# EAGLE board power (EAGLE 7.5.0)
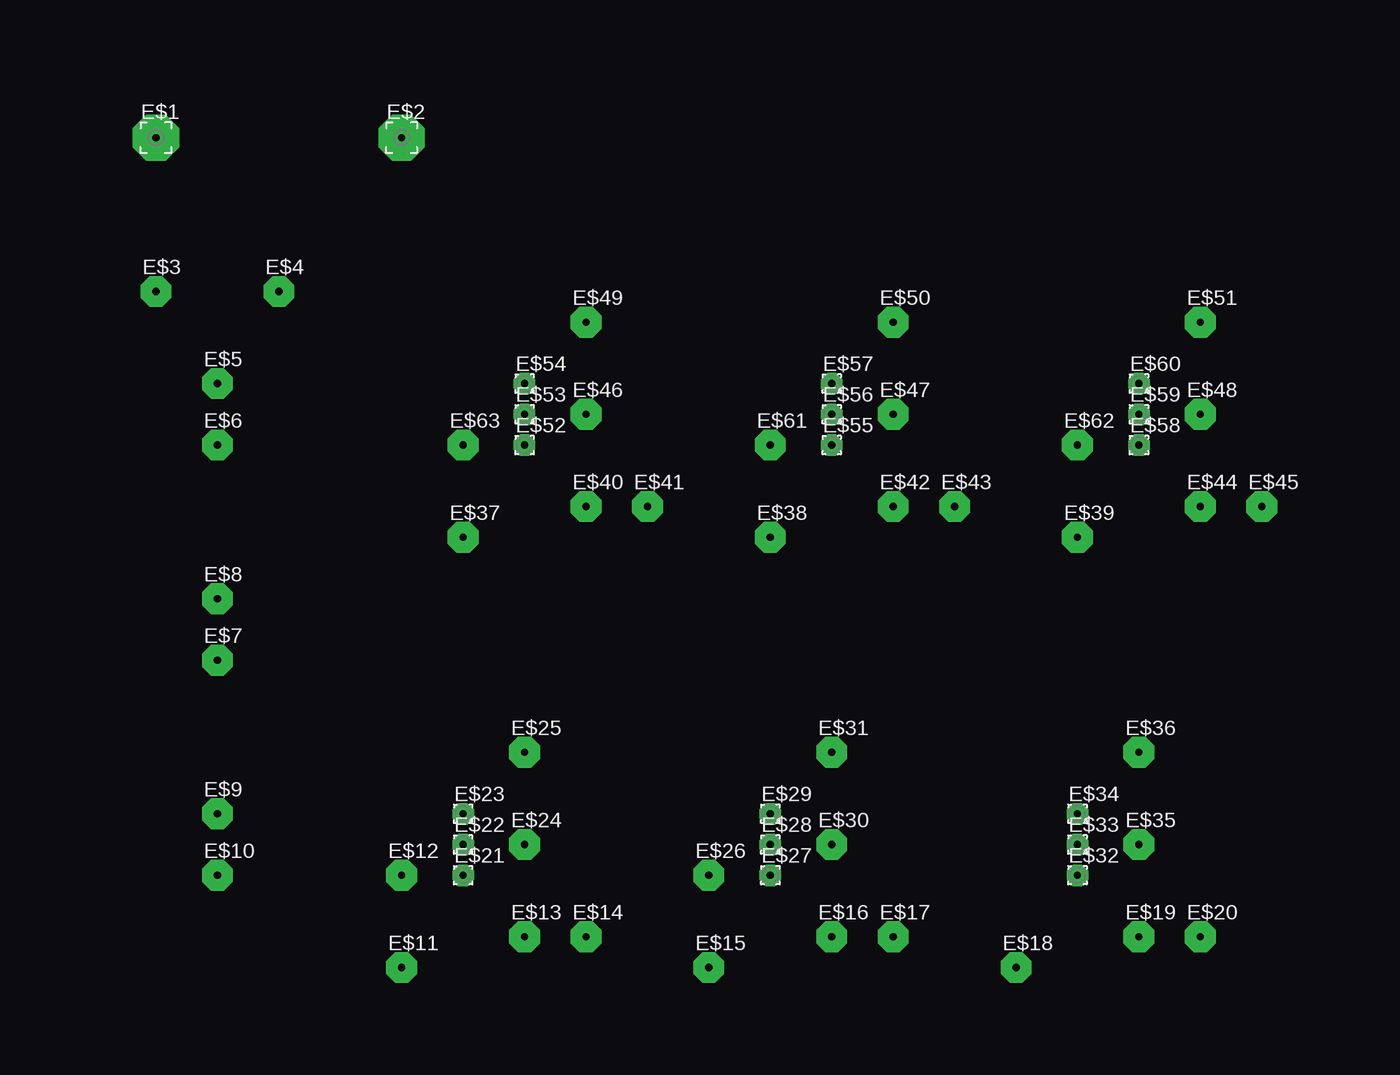
[diagram p0: board, top side]
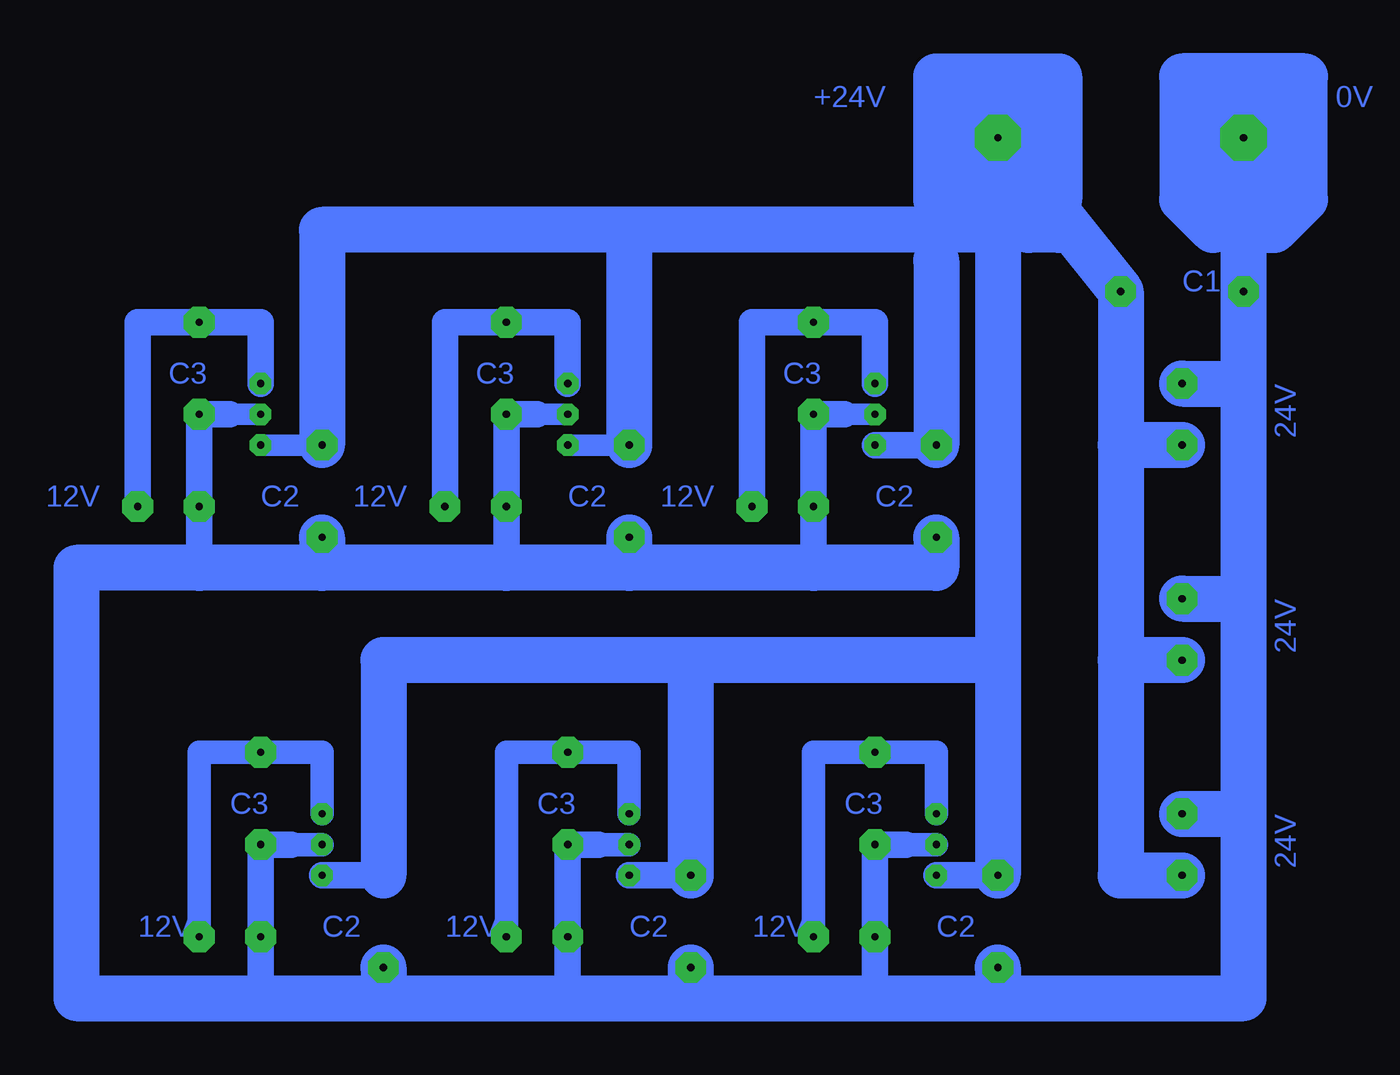
[diagram p1: board, bottom side, seen from below]

No outline drawn. Coordinates in mm, seen from the top.
Copper layers (1*16): Top 0.035mm / dielectric 1.5mm / Bottom 0.035mm
Design rules "default": minimum track width 10mil, minimum drill 24mil, track to track 8mil, track to pad 8mil, pad to pad 8mil, via to via 8mil, smd to smd 8mil, copper to edge 40mil, drill to drill 8mil, minimum pad ring 10mil, minimum via ring 8mil, stop-mask expansion 4mil, vias tented up to drill 0mil, thermal gap 10mil

## Footprints (pad centres in the part's own frame; a part is rotated, then mirrored left to right if it is on the bottom)
2,54/0,8 = drill 0.6 pad 3.81 octagon: 1 0,0
2,15/1,0 = drill 0.6 pad 2.54 octagon: 1 0,0
1,6/0,8 = drill 0.6 pad 1.778 octagon: 1 0,0

## Placement (x,y rotation side)
E$1  [2,54/0,8]  2.54,78.74 0 top
E$2  [2,54/0,8]  22.86,78.74 0 top
E$3  [2,15/1,0]  2.54,66.04 0 top
E$4  [2,15/1,0]  12.7,66.04 0 top
E$5  [2,15/1,0]  7.62,58.42 0 top
E$6  [2,15/1,0]  7.62,53.34 0 top
E$7  [2,15/1,0]  7.62,35.56 0 top
E$8  [2,15/1,0]  7.62,40.64 0 top
E$9  [2,15/1,0]  7.62,22.86 0 top
E$10  [2,15/1,0]  7.62,17.78 0 top
E$11  [2,15/1,0]  22.86,10.16 0 top
E$12  [2,15/1,0]  22.86,17.78 0 top
E$13  [2,15/1,0]  33.02,12.7 0 top
E$14  [2,15/1,0]  38.1,12.7 0 top
E$15  [2,15/1,0]  48.26,10.16 0 top
E$16  [2,15/1,0]  58.42,12.7 0 top
E$17  [2,15/1,0]  63.5,12.7 0 top
E$18  [2,15/1,0]  73.66,10.16 0 top
E$19  [2,15/1,0]  83.82,12.7 0 top
E$20  [2,15/1,0]  88.9,12.7 0 top
E$21  [1,6/0,8]  27.94,17.78 0 top
E$22  [1,6/0,8]  27.94,20.32 0 top
E$23  [1,6/0,8]  27.94,22.86 0 top
E$24  [2,15/1,0]  33.02,20.32 0 top
E$25  [2,15/1,0]  33.02,27.94 0 top
E$26  [2,15/1,0]  48.26,17.78 0 top
E$27  [1,6/0,8]  53.34,17.78 0 top
E$28  [1,6/0,8]  53.34,20.32 0 top
E$29  [1,6/0,8]  53.34,22.86 0 top
E$30  [2,15/1,0]  58.42,20.32 0 top
E$31  [2,15/1,0]  58.42,27.94 0 top
E$32  [1,6/0,8]  78.74,17.78 0 top
E$33  [1,6/0,8]  78.74,20.32 0 top
E$34  [1,6/0,8]  78.74,22.86 0 top
E$35  [2,15/1,0]  83.82,20.32 0 top
E$36  [2,15/1,0]  83.82,27.94 0 top
E$37  [2,15/1,0]  27.94,45.72 0 top
E$38  [2,15/1,0]  53.34,45.72 0 top
E$39  [2,15/1,0]  78.74,45.72 0 top
E$40  [2,15/1,0]  38.1,48.26 0 top
E$41  [2,15/1,0]  43.18,48.26 0 top
E$42  [2,15/1,0]  63.5,48.26 0 top
E$43  [2,15/1,0]  68.58,48.26 0 top
E$44  [2,15/1,0]  88.9,48.26 0 top
E$45  [2,15/1,0]  93.98,48.26 0 top
E$46  [2,15/1,0]  38.1,55.88 0 top
E$47  [2,15/1,0]  63.5,55.88 0 top
E$48  [2,15/1,0]  88.9,55.88 0 top
E$49  [2,15/1,0]  38.1,63.5 0 top
E$50  [2,15/1,0]  63.5,63.5 0 top
E$51  [2,15/1,0]  88.9,63.5 0 top
E$52  [1,6/0,8]  33.02,53.34 0 top
E$53  [1,6/0,8]  33.02,55.88 0 top
E$54  [1,6/0,8]  33.02,58.42 0 top
E$55  [1,6/0,8]  58.42,53.34 0 top
E$56  [1,6/0,8]  58.42,55.88 0 top
E$57  [1,6/0,8]  58.42,58.42 0 top
E$58  [1,6/0,8]  83.82,53.34 0 top
E$59  [1,6/0,8]  83.82,55.88 0 top
E$60  [1,6/0,8]  83.82,58.42 0 top
E$61  [2,15/1,0]  53.34,53.34 0 top
E$62  [2,15/1,0]  78.74,53.34 0 top
E$63  [2,15/1,0]  27.94,53.34 0 top

## Library data of the parts
E$1-E$63 = cls

## Nets
S$4: E$14.1 E$23.1
S$7: E$17.1 E$29.1
S$9: E$20.1 E$34.1
S$10: E$41.1 E$49.1 E$54.1
S$11: E$2.1 E$4.1 E$6.1 E$7.1 E$10.1 E$12.1 E$21.1 E$26.1 E$27.1 E$52.1 E$55.1 E$58.1 E$63.1
S$13: E$1.1 E$3.1 E$5.1 E$8.1 E$9.1 E$11.1 E$13.1 E$15.1 E$18.1 E$19.1 E$22.1 E$28.1 E$33.1 E$37.1 E$38.1 E$39.1 E$40.1 E$42.1 E$44.1 E$46.1 E$47.1 E$48.1 E$53.1 E$56.1 E$59.1
S$14: E$43.1 E$50.1 E$57.1
S$15: E$45.1 E$51.1 E$60.1

## Tracks (layer width: path | path; a pad name or v marks a point on that pad's centre or on a via)
S$1
  Bottom 3.81: 20.32,76.2 20.32,81.28 25.4,81.28 25.4,73.66 27.94,73.66 27.94,83.82 17.78,83.82 17.78,73.66
S$2
  Bottom 3.81: 17.78,71.12 20.32,71.12 20.32,73.66
S$4
  Bottom 1.93: E$23.1 27.94,27.94 38.1,27.94 E$14.1
S$7
  Bottom 1.93: E$29.1 53.34,27.94 63.5,27.94 E$17.1
S$9
  Bottom 1.93: E$34.1 78.74,27.94 88.9,27.94 E$20.1
S$10
  Bottom 1.778: 33.02,63.5 E$49.1 43.18,63.5
  Bottom 2.184: E$54.1 33.02,63.5 43.18,63.5 E$41.1
S$11
  Bottom 1.778: 53.34,53.34 E$55.1 | 78.74,53.34 E$58.1
  Bottom 2.184: E$52.1 E$63.1 | E$21.1 E$12.1 | E$27.1 E$26.1 | 78.74,17.78 73.66,17.78
  Bottom 2.54: 22.86,71.12 27.94,71.12 | 27.94,71.12 53.34,71.12 | 27.94,71.12 27.94,68.58
  Bottom 3.81: 12.7,53.34 E$4.1 E$2.1 22.86,71.12 | 12.7,53.34 12.7,35.56 | 12.7,35.56 12.7,17.78 E$10.1 | E$7.1 12.7,35.56 | E$6.1 12.7,53.34 | 22.86,71.12 22.86,35.56 | 22.86,35.56 E$12.1 | 22.86,71.12 53.34,71.12 | 53.34,71.12 78.74,71.12 78.74,53.34 | 22.86,35.56 48.26,35.56 | 48.26,35.56 73.66,35.56 73.66,17.78 | 48.26,35.56 E$26.1 | 27.94,68.58 E$63.1 | 53.34,71.12 53.34,53.34
S$13
  Bottom 1.778: E$59.1 86.36,55.88 | E$48.1 E$44.1 88.9,43.18 | E$56.1 60.96,55.88 | E$47.1 E$42.1 63.5,43.18 | 38.1,43.18 E$40.1 E$46.1 | 35.56,55.88 E$53.1
  Bottom 1.93: E$33.1 81.28,20.32 | 83.82,20.32 E$19.1 83.82,7.62 | E$28.1 55.88,20.32 | E$22.1 30.48,20.32 | 33.02,20.32 E$13.1 33.02,7.62
  Bottom 2.184: 33.02,7.62 33.02,20.32 30.48,20.32 | 55.88,20.32 58.42,20.32 58.42,7.62 | 81.28,20.32 83.82,20.32 83.82,7.62 | 86.36,55.88 E$48.1 88.9,43.18 | 60.96,55.88 E$47.1 63.5,43.18 | 35.56,55.88 E$46.1 38.1,43.18
  Bottom 2.54: 2.54,71.12 E$3.1 2.54,58.42
  Bottom 3.81: E$37.1 27.94,43.18 38.1,43.18 53.34,43.18 | 53.34,43.18 63.5,43.18 78.74,43.18 | 78.74,43.18 88.9,43.18 99.06,43.18 99.06,7.62 83.82,7.62 73.66,7.62 | 73.66,7.62 58.42,7.62 48.26,7.62 | 48.26,7.62 33.02,7.62 22.86,7.62 | 22.86,7.62 2.54,7.62 2.54,22.86 | 2.54,22.86 2.54,40.64 | 2.54,40.64 2.54,58.42 | 2.54,58.42 2.54,71.12 | 2.54,71.12 2.54,76.2 | 2.54,76.2 E$1.1 | E$11.1 22.86,7.62 | E$15.1 48.26,7.62 | E$18.1 73.66,7.62 | E$39.1 78.74,43.18 | E$38.1 53.34,43.18 | E$5.1 2.54,58.42 | E$8.1 2.54,40.64 | E$9.1 2.54,22.86 | 2.54,76.2 0,76.2 0,81.28 5.08,81.28 5.08,73.66 | 5.08,73.66 0,73.66 | 0,73.66 -2.54,73.66 | -2.54,73.66 -2.54,83.82 7.62,83.82 7.62,73.66 | 7.62,73.66 5.08,73.66 | 0,73.66 2.54,71.12 | 2.54,71.12 0,71.12 -2.54,73.66 | 5.08,71.12 7.62,73.66
S$14
  Bottom 1.778: 58.42,63.5 E$50.1 68.58,63.5
  Bottom 2.184: E$57.1 58.42,63.5 68.58,63.5 E$43.1
S$15
  Bottom 1.778: 83.82,63.5 E$51.1 93.98,63.5
  Bottom 2.184: E$60.1 83.82,63.5 93.98,63.5 E$45.1

## Text on the board
Bottom: 0V | +24V | C1 | 24V | C3 | C3 | C3 | C2 | 12V | C2 | 12V | C2 | 12V | 24V | 24V | C3 | C3 | C3 | C2 | 12V | C2 | 12V | C2 | 12V